# EAGLE board FinalConnectionCAD (EAGLE 9.7.0)
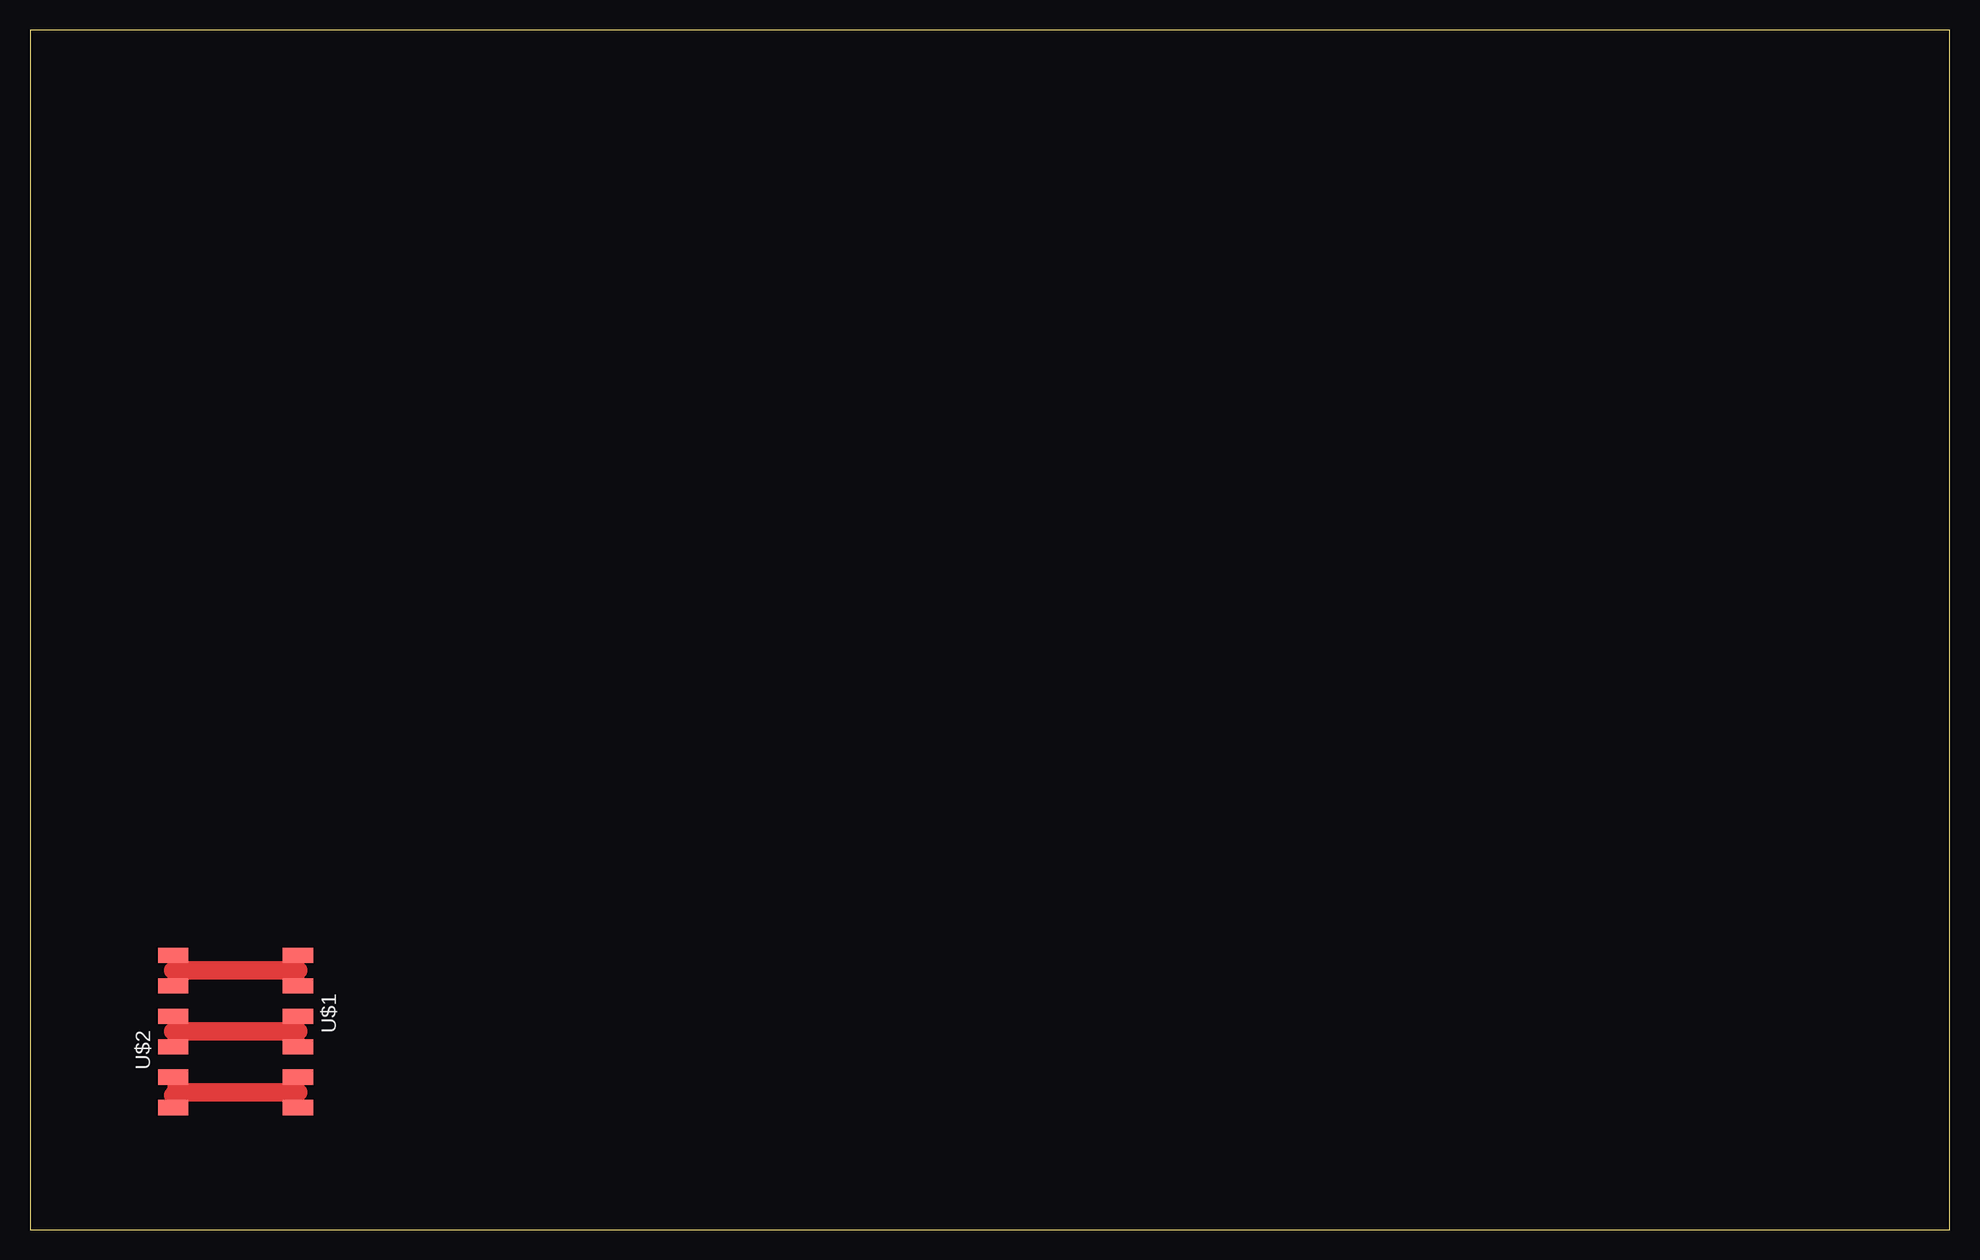
[diagram p0: board, top side]
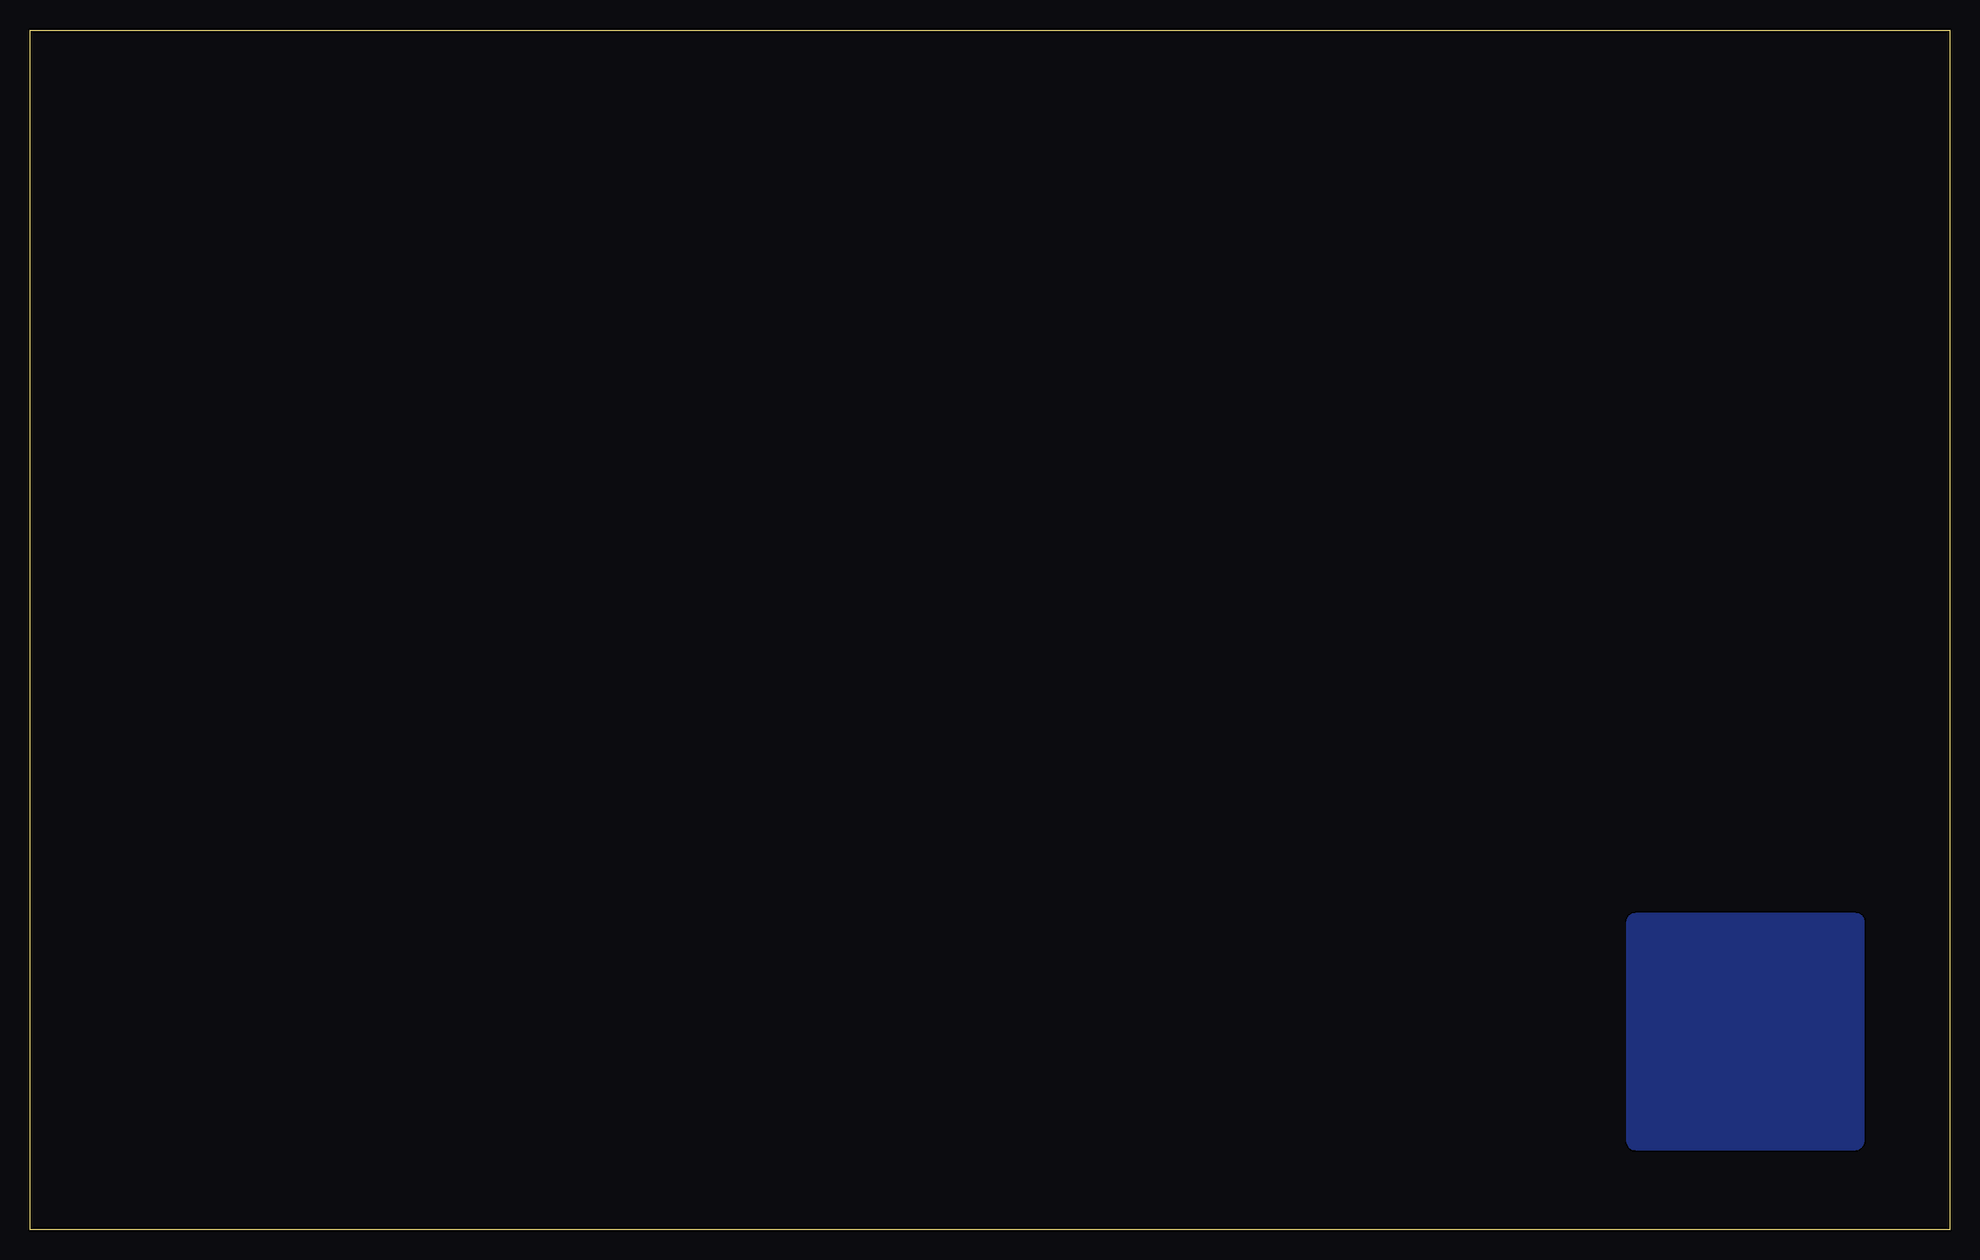
[diagram p1: board, bottom side, seen from below]

Size 160 x 100 mm. Coordinates in mm from the lower left corner, seen from the top.
Outline: 0,0 160,0 160,100 0,100 0,0
Copper layers (1*16): Top 0.035mm / dielectric 1.5mm / Bottom 0.035mm
Design rules "default *": minimum track width 6mil, minimum drill 0.35mm, track to track 17mil, track to pad 17mil, pad to pad 17mil, via to via 17mil, smd to smd 17mil, copper to edge 40mil, drill to drill 6mil, minimum pad ring 10mil, minimum via ring 8mil, stop-mask expansion 4mil, vias tented up to drill 0mil, thermal gap 10mil

## Footprints (pad centres in the part's own frame; a part is rotated, then mirrored left to right if it is on the bottom)
1X06SMD = smd 2.54 x 1.27: 1 0,6.35; 2 0,3.81; 3 0,1.27; 4 0,-1.27; 5 0,-3.81; 6 0,-6.35

## Placement (x,y rotation side)
U$1  CONN_06_FTDI-SMD-HEADER  [1X06SMD]  22.35,16.51 180 top
U$2  CONN_06_FTDI-SMD-HEADER  [1X06SMD]  11.94,16.51 0 top

## Library data of the parts
U$1 U$2 = fab

## Nets
GND: U$1.1 U$1.2 U$2.5 U$2.6
SIGNAL: U$1.3 U$1.4 U$2.3 U$2.4
VCC: U$1.5 U$1.6 U$2.1 U$2.2

## Tracks (layer width: path | path; a pad name or v marks a point on that pad's centre or on a via)
GND
  Top 1.016: U$2.5 11.94,11.18 U$2.6 | U$1.2 22.35,11.43 U$1.1
  Top 1.524: 11.94,11.18 12.19,11.43 22.35,11.43
OUTLINE
  pour Bottom: 7.11,26.42 7.11,6.86 7.37,6.6 26.92,6.6 26.92,26.42
SIGNAL
  Top 1.016: U$2.3 11.94,16.51 U$2.4 | U$1.4 22.35,16.51 U$1.3
  Top 1.524: 11.94,16.51 22.35,16.51
VCC
  Top 1.016: U$2.1 11.94,21.59 U$2.2 | U$1.6 22.35,21.59 U$1.5
  Top 1.524: 22.35,21.59 11.94,21.59